# EAGLE board ScenOchSinneSensor (EAGLE 6.0)
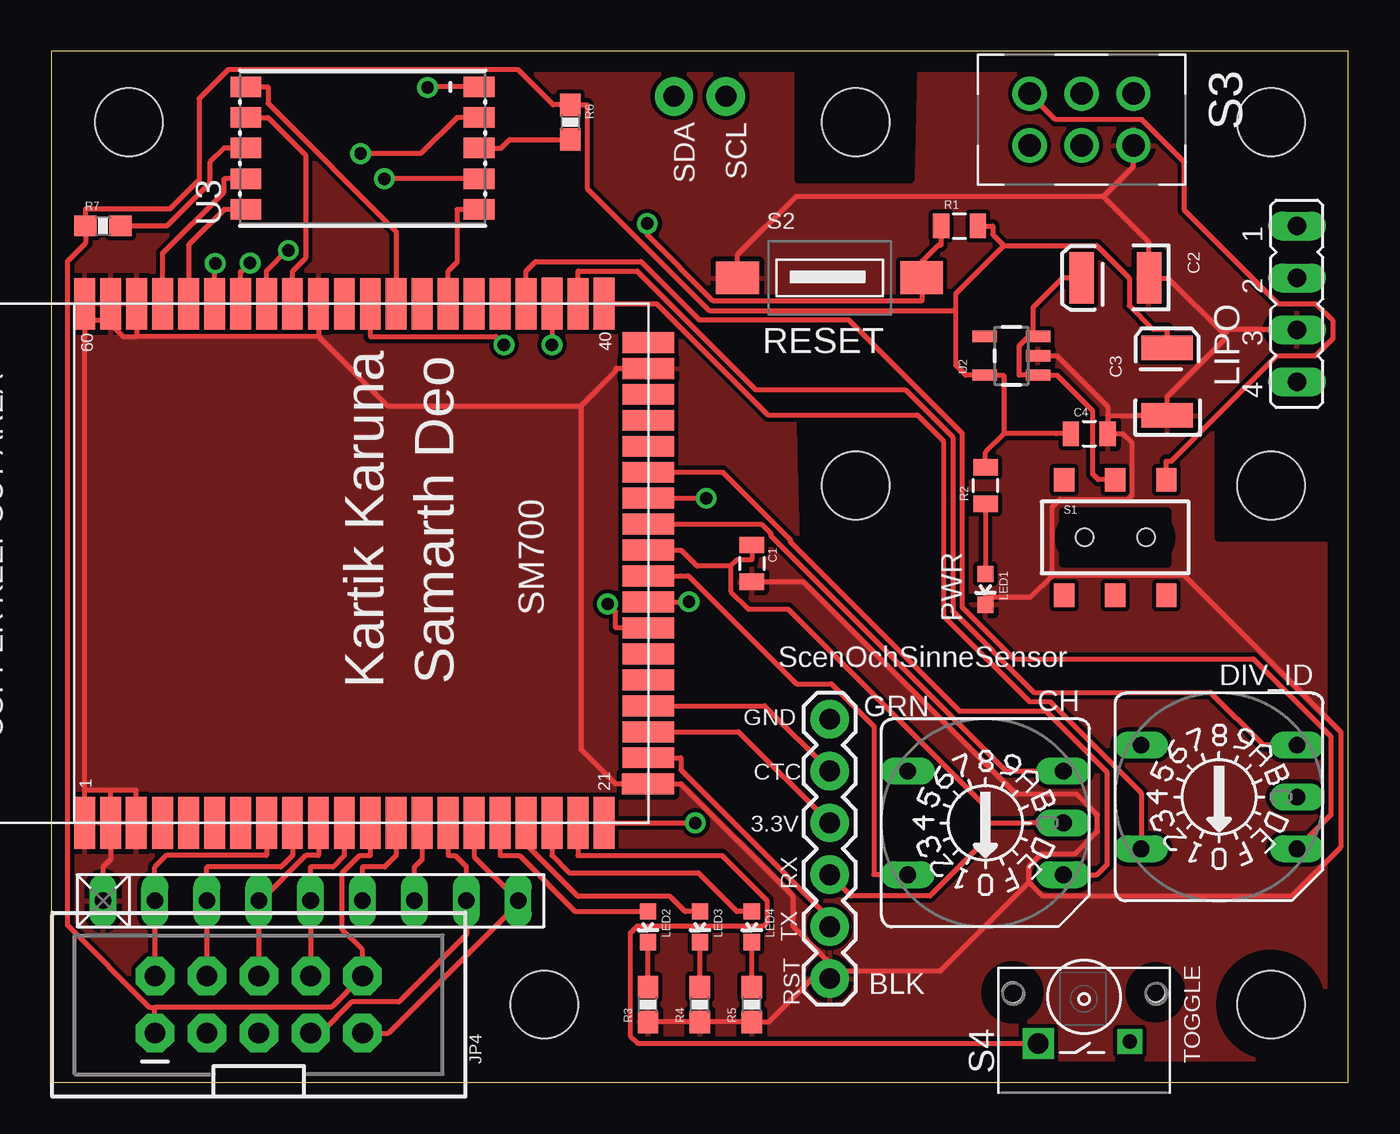
[diagram p0: board, top side]
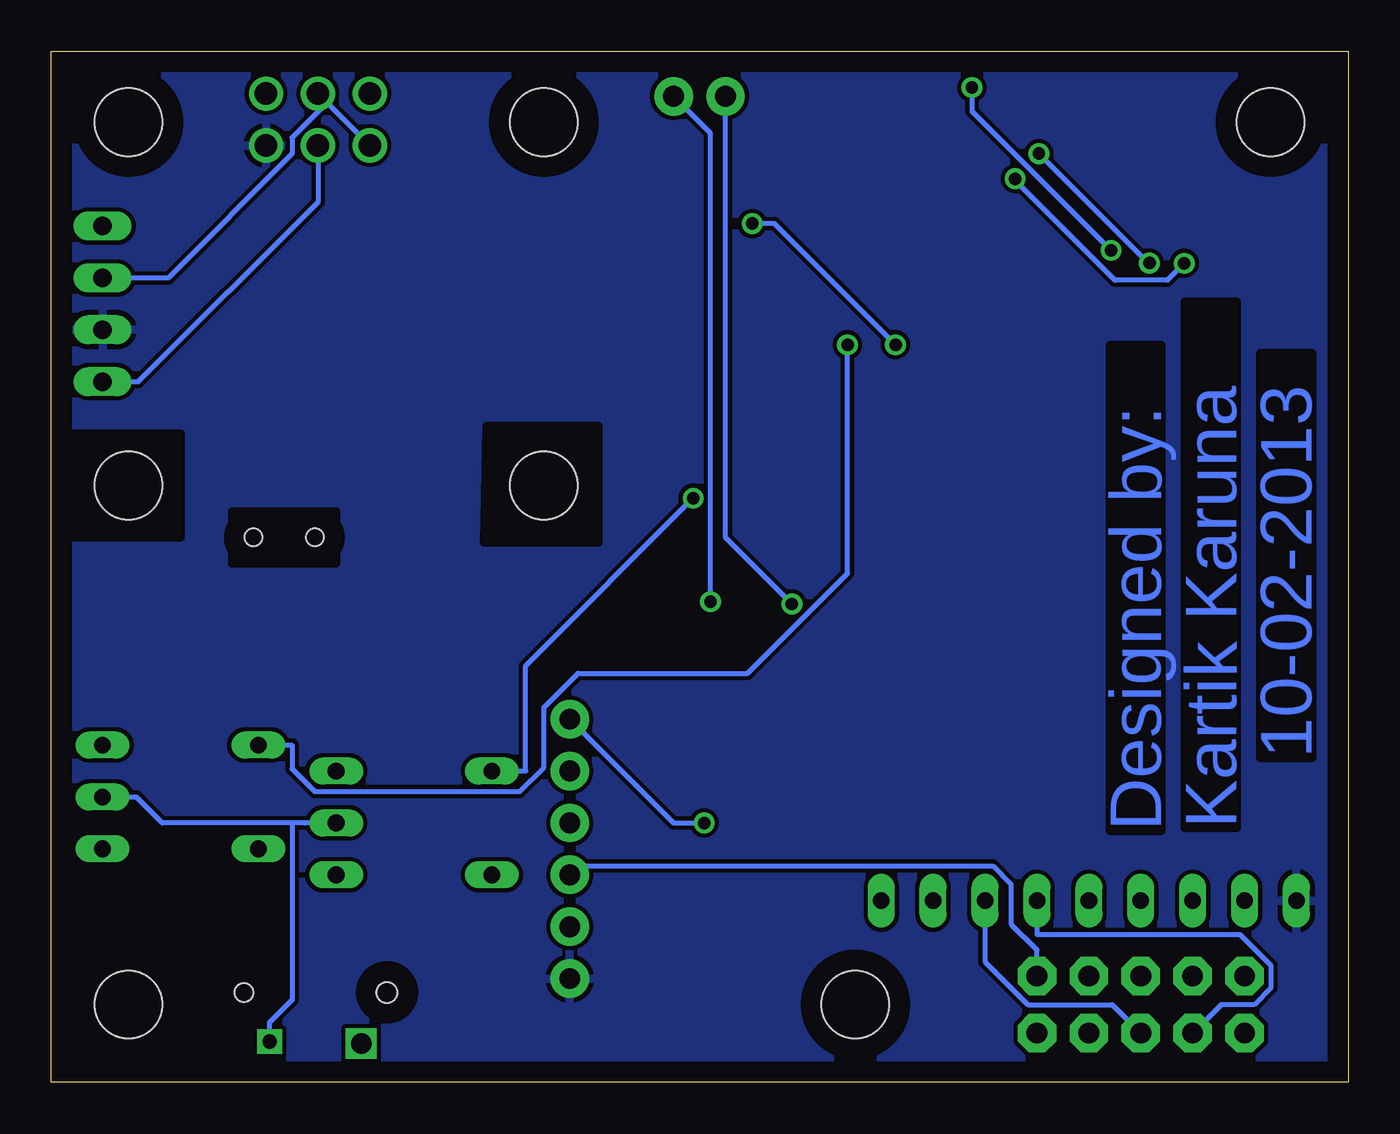
[diagram p1: board, bottom side, seen from below]

Size 63.48 x 50.47 mm. Coordinates in mm from the lower left corner, seen from the top.
Outline: 0,0 63.48,0 63.48,50.47 0,50.47 0,0
Copper layers (1*16): Top 0.035mm / dielectric 1.5mm / Bottom 0.035mm
Design rules: minimum track width 10mil, minimum drill 24mil, track to track 8mil, track to pad 8mil, pad to pad 8mil, via to via 8mil, smd to smd 8mil, copper to edge 40mil, drill to drill 8mil, minimum pad ring 10mil, minimum via ring 8mil, stop-mask expansion 4mil, vias tented up to drill 0mil, thermal gap 10mil
bKeepout: area 36.4,44.2 to 42.3,49.8
tRestrict: area 57.1,26.7 to 62.2,31.8; area 36.7,26.5 to 42.3,32.1; area 36.6,44.2 to 42.2,49.8; area 49.5,25.4 to 54.6,27.9; area 46.6,3.7 to 47.6,5; area 0.9,44.1 to 6.6,49.9
bRestrict: area 57.1,26.7 to 62.2,31.8; area 36.7,26.4 to 42.3,32.1; area 49.5,25.4 to 54.6,27.9; area 53.2,3.8 to 54.6,5.1; area 46.6,3.7 to 47.6,5

## Footprints (pad centres in the part's own frame; a part is rotated, then mirrored left to right if it is on the bottom)
0805 = smd 0.8 x 1.2: 1 -0.9,0; 2 0.9,0
EIA3528 = smd 1.2 x 2.5: A 1.65,0; C -1.65,0
A1353HEX = drill 0.813 long: 1 3.81,-2.54; 2 -3.81,2.54; 4 3.81,2.54; 8 -3.81,-2.54; C 3.81,0
FTDI_BASIC = drill 1.016 pad 1.88: CTS 10.16,0; DTR 0,0; GND 12.7,0; RXI 2.54,0; TXO 5.08,0; VCC 7.62,0
JP4 = drill 0.914 long: 1 -3.81,0; 2 -1.27,0; 3 1.27,0; 4 3.81,0
1X02_NO_SILK = drill 1.016 pad 1.88: 1 0,0; 2 2.54,0
2X5-SHROUDED_LOCK = drill 1.016 pad 1.88 octagon: 1 -1.397,5.08; 2 1.397,5.08; 3 -1.397,2.54; 4 1.397,2.54; 5 -1.397,0; 6 1.397,0; 7 -1.397,-2.54; 8 1.397,-2.54; 9 -1.397,-5.08; 10 1.397,-5.08
STAND-OFF = hole 3.302: 0,0
LED-0603 = smd 0.8 x 0.8: A 0,-0.75; C 0,0.75
SS-22 = drill 1.1 pad 1.676: 1 -2.54,1.27; 2 0,1.27; 3 2.54,1.27; 4 -2.54,-1.27; 5 0,-1.27; 6 2.54,-1.27
0603-RES = smd 1.1 x 1: 1 -0.85,0; 2 0.85,0
RN-9 = drill 0.813 long: 1 -10.16,0; 2 -7.62,0; 3 -5.08,0; 4 -2.54,0; 5 0,0; 6 2.54,0; 7 5.08,0; 8 7.62,0; 9 10.16,0
AYZ0202 = smd 1 x 1.15: 1 -2.5,2.825; 2 0,2.825; 3 2.5,2.825; 4 -2.5,-2.825; 5 0,-2.825; 6 2.5,-2.825 | hole 0.85: 1.5,0; -1.5,0
TYCO_FSM = smd 1.6 x 2.1: 1 0,-4.51; 2 -0.01,4.5
TYCO_FSMRACDA = drill 1 square: 1 0,2.24 | drill 0.7 square: 2 0.1,-2.24 | hole 1: 2.5,3.5 | hole 0.9: 2.5,-3.5
SYNAPSE_SN700PC1 = smd 2.54 x 1.02: P$1 0,28.83; P$2 0,27.56; P$3 0,26.32; P$4 0,25.02; P$5 0,23.75; P$6 0,22.48; P$7 0,21.21; P$8 0,19.94; P$9 0,18.67; P$10 0,17.4; P$11 0,16.13; P$12 0,14.86; P$13 0,13.59; P$14 0,12.32; P$15 0,11.05; P$16 0,9.78; P$17 0,8.51; P$18 0,7.24; P$19 0,5.97; P$20 0,4.7; P$21 0,3.43; P$40 25.41,3.43; P$41 25.4,4.7; P$42 25.42,5.97; P$43 25.4,7.24; P$44 25.4,8.51; P$45 25.4,9.78; P$46 25.4,11.05; P$47 25.4,12.32; P$48 25.4,13.59; P$49 25.4,14.86; P$50 25.4,16.13; P$51 25.4,17.4; P$52 25.4,18.67; P$53 25.4,19.94; P$54 25.4,21.21; P$55 25.4,22.48; P$56 25.4,23.75; P$57 25.4,25.02; P$58 25.4,26.29; P$59 25.4,27.56; P$60 25.4,28.83 | smd 1.02 x 2.54: P$22 1.91,1.27; P$23 3.19,1.26; P$24 4.46,1.26; P$25 5.73,1.26; P$26 7,1.26; P$27 8.27,1.26; P$28 9.54,1.26; P$29 10.82,1.26; P$30 12.09,1.26; P$31 13.35,1.26; P$32 14.62,1.26; P$33 15.89,1.26; P$34 17.16,1.26; P$35 18.43,1.26; P$36 19.7,1.26; P$37 20.97,1.26; P$38 22.24,1.26; P$39 23.51,1.26
SOT23-5 = smd 0.55 x 1.2: 1 -0.95,-1.3; 2 0,-1.3; 3 0.95,-1.3; 4 0.95,1.3; 5 -0.95,1.3
SMD-7SEG = smd 1 x 1.5: 1 3,-5.7; 2 1.5,-5.7; 3 0,-5.7; 4 -1.5,-5.7; 5 -3,-5.7; 6 -3,5.7; 7 -1.5,5.7; 8 0,5.7; 9 1.5,5.7; 10 3,5.7

## Placement (x,y rotation side)
C1  10uF  [0805]  34.29,25.4 270 top
C2  10uF  [EIA3528]  52.07,39.37 180 top
C3  10uF  [EIA3528]  54.61,34.29 90 top
C4  1uF  [0805]  50.8,31.75 0 top
CH  HIX DIP  [A1353HEX]  45.72,12.7 0 top
DIV_ID  HIX DIP  [A1353HEX]  57.15,13.97 0 top
JP1  FTDI  [FTDI_BASIC]  38.1,17.78 270 top
JP2  LIPO  [JP4]  60.96,38.1 270 top
JP3  I2C_BUS  [1X02_NO_SILK]  30.48,48.26 0 top
JP4  M05X2SHD_LOCK  [2X5-SHROUDED_LOCK]  10.16,3.81 90 top
JP5  STAND-OFF  [STAND-OFF]  59.69,29.21 0 top
JP6  STAND-OFF  [STAND-OFF]  39.37,29.21 0 top
JP7  STAND-OFF  [STAND-OFF]  59.69,3.81 0 top
JP8  STAND-OFF  [STAND-OFF]  24.13,3.81 0 top
JP9  STAND-OFF  [STAND-OFF]  3.81,46.99 0 top
JP10  STAND-OFF  [STAND-OFF]  39.37,46.99 0 top
JP11  STAND-OFF  [STAND-OFF]  59.69,46.99 0 top
LED1  RED  [LED-0603]  45.72,24.13 180 top
LED2  GREEN  [LED-0603]  29.21,7.62 180 top
LED3  YELLOW  [LED-0603]  31.75,7.62 180 top
LED4  BLUE  [LED-0603]  34.29,7.62 180 top
PRIMARY_SW  S3  [SS-22]  50.42,47.12 0 top
R1  100k  [0805]  44.45,41.91 0 top
R2  1k  [0805]  45.72,29.21 90 top
R3  330  [0603-RES]  29.21,3.81 90 top
R4  330  [0603-RES]  31.75,3.81 90 top
R5  330  [0603-RES]  34.29,3.81 90 top
R6  330  [0603-RES]  25.4,46.99 270 top
R7  330  [0603-RES]  2.54,41.91 0 top
RN2  22K  [RN-9]  12.7,8.89 0 top
S1  Secondary sw  [AYZ0202]  52.07,26.67 0 top
S2  RESET  [TYCO_FSM]  38.1,39.37 270 top
S4  TOGGLE  [TYCO_FSMRACDA]  50.55,1.91 90 top
U1  SM700PC1SMD  [SYNAPSE_SN700PC1]  30.48,12.7 90 top
U2  MIC5219  [SOT23-5]  46.99,35.56 90 top
U3  KCSA03-102SMD_7SEG  [SMD-7SEG]  15.24,45.72 90 top

## Library data of the parts
C1-C4 R1-R7 = SparkFun-Passives
CH DIV_ID = switch-dil; OC_FARNELL: unknown; OC_NEWARK: unknown
JP1 JP3 JP4 = SparkFun-Connectors
JP2 = jumper
JP5-JP11 = SparkFun
LED1-LED4 = SparkFun-LED
PRIMARY_SW = cy-con
RN2 = resistor-net; OC_FARNELL: unknown; OC_NEWARK: unknown
S1 = SparkFun-Electromechanical; PROD_ID: SWCH-08179
S2 S4 = cy_fsmsm
U1 = Synapse_SM700PC1
U2 = SparkFun-PowerIC
U3 = cy-7-seg

## Nets
3.3V: C1.1 C3.A C4.1 CH.C DIV_ID.C JP1.VCC JP4.1 JP4.10 R1.2 R2.2 R6.1 R7.1 S4.2 U1.P$12 U1.P$31 U2.5
7SEG_A: U1.P$57 U3.7
7SEG_B: U1.P$56 U3.6
7SEG_C: U1.P$55 U3.4
7SEG_D: U1.P$54 U3.2
7SEG_DP: U1.P$46 U3.5
7SEG_E: U1.P$53 U3.1
7SEG_F: U1.P$52 U3.9
7SEG_G: U1.P$48 U3.10
ADC0: JP4.2 RN2.2 U1.P$8
ADC1: JP4.4 RN2.3 U1.P$9
ADC2: JP4.6 RN2.4 U1.P$10
ADC3: JP4.8 RN2.5 U1.P$11
ADC4: JP4.3 RN2.6 U1.P$13
ADC5: JP4.5 RN2.7 U1.P$14
ADC6: JP4.7 RN2.8 U1.P$15
ADC7: JP4.9 RN2.9 U1.P$16
CH_1: CH.1 U1.P$34
CH_2: CH.2 U1.P$33
CH_3: CH.4 U1.P$32
CH_4: CH.8 U1.P$30
CTS2: JP1.CTS U1.P$23
DIV_1: DIV_ID.1 U1.P$43
DIV_2: DIV_ID.2 U1.P$42
DIV_3: DIV_ID.4 U1.P$41
DIV_4: DIV_ID.8 U1.P$40
EN: JP2.4 PRIMARY_SW.5
GND: C1.2 C2.C C3.C C4.2 JP1.GND JP2.3 LED1.C PRIMARY_SW.6 R3.1 R4.1 R5.1 RN2.1 S2.1 U1.P$1 U1.P$2 U1.P$3 U1.P$22 U1.P$38 U1.P$51 U1.P$58 U1.P$59 U1.P$60 U2.2
LED2: LED2.A U1.P$17
LED3: LED3.A U1.P$18
LED4: LED4.A U1.P$19
N$1: LED3.C R4.2
N$2: LED1.A R2.1
N$3: R6.2 U3.3
N$4: LED2.C R3.2
N$5: R7.2 U3.8
N$6: LED4.C R5.2
PS: JP2.1
RESET: R1.1 S2.2 U1.P$49
RTS2: JP1.DTR U1.P$21
RX2: JP1.TXO U1.P$24
SCL: JP3.2 U1.P$29
SDA: JP3.1 U1.P$28
TOGL: S4.1 U1.P$20
TX2: JP1.RXI U1.P$25
VBATT: JP2.2 PRIMARY_SW.2 PRIMARY_SW.4
VCC1: PRIMARY_SW.1 S1.3
VIN: C2.A S1.2 U2.1 U2.3

## Tracks (layer width: path | path; a pad name or v marks a point on that pad's centre or on a via)
3.3V
  Top 0.254: 44.27,37.78 44.27,38.6 46.62,40.95 | 44.27,37.78 44.27,35.1 44.76,34.61 U2.5 46.62,34.61 46.62,31.75 | 44.27,37.78 32.2,37.78 26.23,43.75 26.23,47.84 R6.1 24.98,47.84 24.57,47.84 22.86,49.55 8.65,49.55 7.24,48.14 7.24,44.17 5.81,42.74 1.69,42.74 R7.1 1.69,41.08 0.81,40.2 0.81,7.68 4.83,3.66 5.08,3.66 | 46.62,40.95 51.17,40.95 52.76,39.36 52.76,38.01 53.9,36.87 54.61,36.87 C3.A | 46.62,40.95 46.08,41.49 46.08,41.91 R1.2 | 46.62,31.75 46.62,31.74 45.72,30.84 R2.2 | 46.62,31.75 49.17,31.75 C4.1 | 33.25,25.26 33.25,24.03 34.12,23.16 36.07,23.16 45.65,13.57 45.65,12.7 | C1.1 34.29,25.57 33.56,25.57 33.25,25.26 | 33.25,25.26 31.61,25.26 30.82,26.05 U1.P$31 | 45.65,12.7 45.65,11.77 43.01,9.13 39.13,9.13 JP1.VCC | 45.65,12.7 47.88,12.7 CH.C | 5.08,3.66 5.11,3.68 13.72,3.68 JP4.10 15.24,6.48 14.25,7.47 14.25,10.24 15.1,11.1 15.62,11.1 U1.P$12 | JP4.1 5.08,3.66
  Bottom 0.254: 51.68,12.7 58.04,12.7 59.31,13.97 DIV_ID.C | 51.68,12.7 51.07,12.7 CH.C | 51.68,12.7 51.68,4.04 52.79,2.94 S4.2 | JP4.10 15.24,6.48 16.51,7.75 16.51,9.7 17.4,10.59 37.67,10.59 JP1.VCC
7SEG_A
  Top 0.254: U1.P$57 5.46,40.57 8.46,43.57 8.46,44.22 U3.7
7SEG_B
  Top 0.254: U1.P$56 6.73,40.99 8.46,42.72 U3.6
7SEG_C  (via drill 0.61 pad 1.02)
  Top 0.254: U3.4 v16.3,44.22 | U1.P$55 8,40.05 v8.03,40.09
  Bottom 0.254: v8.03,40.09 8.86,39.26 11.42,39.26 16.3,44.14 v16.3,44.22
7SEG_D  (via drill 0.61 pad 1.02)
  Top 0.254: v15.14,45.45 18.09,45.45 19.86,47.22 U3.2 | U1.P$54 9.27,39.7 9.34,39.7 v9.74,40.1
  Bottom 0.254: v15.14,45.45 9.79,40.1 v9.74,40.1
7SEG_DP
  Top 0.254: U1.P$46 19.43,39.7 19.86,40.13 19.86,42.72 U3.5
7SEG_E  (via drill 0.61 pad 1.02)
  Top 0.254: U3.1 18.45,48.72 v18.42,48.69 | v11.62,40.72 11.56,40.72 10.54,39.7 U1.P$53
  Bottom 0.254: v18.42,48.69 18.42,47.53 v11.62,40.72
7SEG_F
  Top 0.254: U1.P$52 11.81,39.7 12.46,40.34 12.46,45.38 10.62,47.22 U3.9
7SEG_G
  Top 0.254: U3.10 10.62,48.72 10.62,47.91 16.89,41.64 U1.P$48
ADC0
  Top 0.254: U1.P$8 10.54,11.1 5.64,11.1 5.08,10.54 RN2.2 JP4.2
ADC1
  Top 0.254: U1.P$9 11.81,11.1 11.25,10.54 7.62,10.54 RN2.3 JP4.4
ADC2
  Top 0.254: JP4.6 RN2.4 10.25,8.89 12.46,11.1 13.08,11.1 U1.P$10
ADC3
  Top 0.254: U1.P$11 14.35,11.1 13.79,10.54 12.7,10.54 RN2.5 JP4.8
ADC4
  Top 0.254: U1.P$13 16.89,11.1 16.33,10.54 15.24,10.54 RN2.6
  Bottom 0.254: RN2.6 15.24,7.24 5.31,7.24 3.79,5.72 3.79,4.63 4.62,3.81 6.22,3.81 JP4.3
ADC5
  Top 0.254: RN2.7 17.78,10.54 18.16,10.92 U1.P$14
  Bottom 0.254: RN2.7 17.78,5.9 15.69,3.81 11.56,3.81 JP4.5
ADC6
  Top 0.254: U1.P$15 19.43,11.1 19.76,11.1 20.32,10.54 RN2.8 20.32,7.24 17.02,3.94 14.71,3.94 13.19,2.41 JP4.7
ADC7
  Top 0.254: 22.6,8.89 22.6,8.51 16.51,2.41 JP4.9 | U1.P$16 20.7,11.05 22.6,9.15 22.6,8.89 | 22.6,8.89 RN2.9
CH_1
  Top 0.254: U1.P$34 32.86,29.86 36.17,26.55 36.17,26.45 44.44,18.18 48.68,18.18 51.66,15.19 51.66,10.64 51.18,10.16 CH.1
CH_2  (via drill 0.61 pad 1.02)
  Top 0.254: U1.P$33 v32.06,28.59
  Bottom 0.254: v32.06,28.59 40.26,20.39 40.26,15.24 CH.2
CH_3
  Top 0.254: U1.P$32 30.82,27.32 34.75,27.32 35.22,26.85 35.22,26.75 46.73,15.24 CH.4
CH_4
  Top 0.254: CH.8 40.26,10.16 40.26,17.43 38.18,19.5 36.47,19.5 31.19,24.79 30.82,24.79 U1.P$30
CTS2
  Top 0.254: U1.P$23 30.82,15.89 30.82,15.29 38.1,8.02 JP1.CTS
DIV_1
  Top 0.254: U1.P$43 23.24,39.7 23.71,40.17 28.86,40.17 31.71,37.32 39.02,37.32 44.57,31.77 44.57,23.25 47.1,20.72 58.82,20.72 62.62,16.92 62.62,13.09 DIV_ID.1
DIV_2  (via drill 0.61 pad 1.02)
  Top 0.254: U1.P$42 v24.51,36.1
  Bottom 0.254: DIV_ID.2 51.69,16.51 51.69,15.33 50.59,14.23 40.56,14.23 39.37,15.42 39.37,18.36 37.7,20.02 29.4,20.02 24.51,24.91 v24.51,36.1
DIV_3
  Top 0.254: DIV_ID.4 59.31,16.51 56.73,19.09 48.09,19.09 44.12,23.07 44.12,31.58 41.79,33.91 34.48,33.91 28.67,39.71 25.79,39.71 25.78,39.7 U1.P$41
DIV_4
  Top 0.254: U1.P$40 29.63,38.11 35.07,32.67 42.39,32.67 43.66,31.4 43.66,22.84 47.86,18.63 48.87,18.63 53.34,14.16 DIV_ID.8
EN
  Bottom 0.254: JP2.4 59.21,34.29 50.42,43.08 PRIMARY_SW.5
GND
  Top 0.254: 47.83,9.78 48.47,9.14 60.74,9.14 63.13,11.53 63.13,17.14 55.46,24.81 48.99,24.81 | 25.93,33.11 25.93,16.29 27.61,14.61 U1.P$22 30.81,14.61 36.32,9.11 36.32,7.61 38.47,5.45 | 25.93,33.11 27.62,34.8 27.62,34.94 U1.P$38 | 13.08,36.5 16.47,33.11 25.93,33.11 | 13.08,36.5 4.19,36.5 | 2.92,37.3 2.92,37.1 3.52,36.5 4.19,36.5 | 2.92,37.3 2.92,37.7 U1.P$59 | U1.P$58 4.19,36.5 | 1.65,14.3 1.65,36.5 1.65,37.3 | U1.P$60 1.65,37.3 | 1.65,37.3 2.92,37.3 | 48.99,24.81 47.93,23.75 45.72,23.75 LED1.C | 48.99,24.81 48.99,28.16 49.37,28.53 52.69,28.53 52.9,28.74 52.9,31.28 52.43,31.75 C4.2 51.7,32.64 | 47.83,9.78 47.83,10.56 48.46,11.19 50.12,11.19 51.21,12.28 51.21,13.1 50.21,14.09 47.23,14.09 36.82,24.5 C1.2 | 38.47,5.45 43.51,5.45 47.83,9.78 | 38.47,5.45 JP1.GND 37.24,5.08 35.12,2.96 R5.1 R4.1 R3.1 | U1.P$51 13.08,36.5 | U1.P$3 4.16,14.3 2.92,14.3 | 2.92,14.3 1.65,14.3 | S2.1 33.59,40.5 36.44,43.35 51.49,43.35 | 51.49,43.35 53.72,41.12 C2.C 54.65,39.37 57.4,36.62 | 2.92,14.3 U1.P$2 2.92,10.92 2.54,10.54 RN2.1 | 57.4,36.62 57.6,36.83 59.32,36.83 JP2.3 | 57.4,36.62 57.4,36.36 54.61,33.57 C3.C 53.03,32.64 51.7,32.64 | 51.7,32.64 51.7,33.08 49.22,35.56 U2.2 | 51.49,43.35 52.96,44.82 PRIMARY_SW.6 | U1.P$1 1.65,14.3
  pour Top: 0,50.8 0,0 63.5,0 63.5,50.8
  pour Bottom: 0,50.8 63.5,50.8 63.5,46.99 63.5,0 0,0
LED2
  Top 0.254: LED2.A 25.65,8.37 22.92,11.1 21.97,11.1 U1.P$17
LED3
  Top 0.254: LED3.A 31.02,8.37 30.29,9.1 25.79,9.1 23.24,11.65 U1.P$18
LED4
  Top 0.254: LED4.A 33.56,8.37 31.67,10.26 25.35,10.26 24.51,11.1 U1.P$19
N$1
  Top 0.254: R4.2 LED3.C
N$2
  Top 0.254: R2.1 LED1.A
N$3
  Top 0.254: U3.3 22.02,45.72 22.44,46.14 R6.2
N$4
  Top 0.254: R3.2 LED2.C
N$5
  Top 0.254: U3.8 8.46,45.72 7.77,45.03 7.77,44.01 5.67,41.91 R7.2
N$6
  Top 0.254: R5.2 LED4.C
RESET  (via drill 0.61 pad 1.02)
  Top 0.254: U1.P$49 15.62,36.5 21.76,36.5 v22.16,36.1 | v29.17,42.03 29.17,41.46 32.39,38.24 42.59,38.24 42.6,38.25 S2.2 42.6,40.16 43.42,40.98 43.55,40.98 R1.1
  Bottom 0.254: v22.16,36.1 28.09,42.03 v29.17,42.03
RTS2  (via drill 0.61 pad 1.02)
  Top 0.254: U1.P$21 v31.52,12.7
  Bottom 0.254: JP1.DTR 33.02,12.7 v31.52,12.7
RX2
  Top 0.254: U1.P$24 33.64,17.16 JP1.TXO
SCL  (via drill 0.61 pad 1.02)
  Top 0.254: v31.21,23.52 30.82,23.52 U1.P$29
  Bottom 0.254: v31.21,23.52 31.21,46.45 JP3.2
SDA  (via drill 0.61 pad 1.02)
  Top 0.254: v27.23,23.41 27.62,23.03 27.62,22.24 U1.P$28
  Bottom 0.254: v27.23,23.41 30.48,26.66 JP3.1
TOGL
  Top 0.254: U1.P$20 25.78,11.1 32.83,11.1 35.02,8.91 35.02,7.8 34.86,7.64 28.67,7.64 28.33,7.31 28.33,2.29 28.72,1.91 S4.1
TX2
  Top 0.254: U1.P$25 34.91,18.43 JP1.RXI
VBATT
  Bottom 0.254: 49.98,47.95 PRIMARY_SW.2 | PRIMARY_SW.4 49.98,47.95 | 49.98,47.95 51.69,46.24 51.69,45.44 57.76,39.37 JP2.2
VCC1
  Top 0.254: S1.3 54.57,30.4 54.83,30.4 59.99,35.56 61.88,35.56 62.74,36.42 62.74,37.25 61.88,38.1 60.04,38.1 55.46,42.69 55.46,45.04 53.38,47.12 49.15,47.12 PRIMARY_SW.1
VIN
  Top 0.254: C2.A 49.49,39.37 48.06,37.94 48.06,36.51 | 48.06,36.51 47.83,36.51 47.36,36.05 47.36,34.61 U2.1 49.22,34.61 50.97,32.86 50.97,29.77 51.24,29.5 S1.2 | U2.3 48.06,36.51

## Text on the board
Bottom: 10-02-2013 | Kartik Karuna | Designed by:
tPlace: SDA | SCL | Kartik Karuna | Samarth Deo | PWR | SM700 | ScenOchSinneSensor | GND | GRN | CTC | 3.3V | RX | TX | RST | BLK